# Altium PCB sunalsorises.PcbDoc
Units mm, origin at the board's own origin, x right, y up, seen from the top; angles counter-clockwise.
Board outline 71 x 21 mm, 2 copper layers (Top Layer, Bottom Layer); 25 components, 31 nets, 121 pads, 20 vias.
Unrouted connection lines stored in the file: 1.
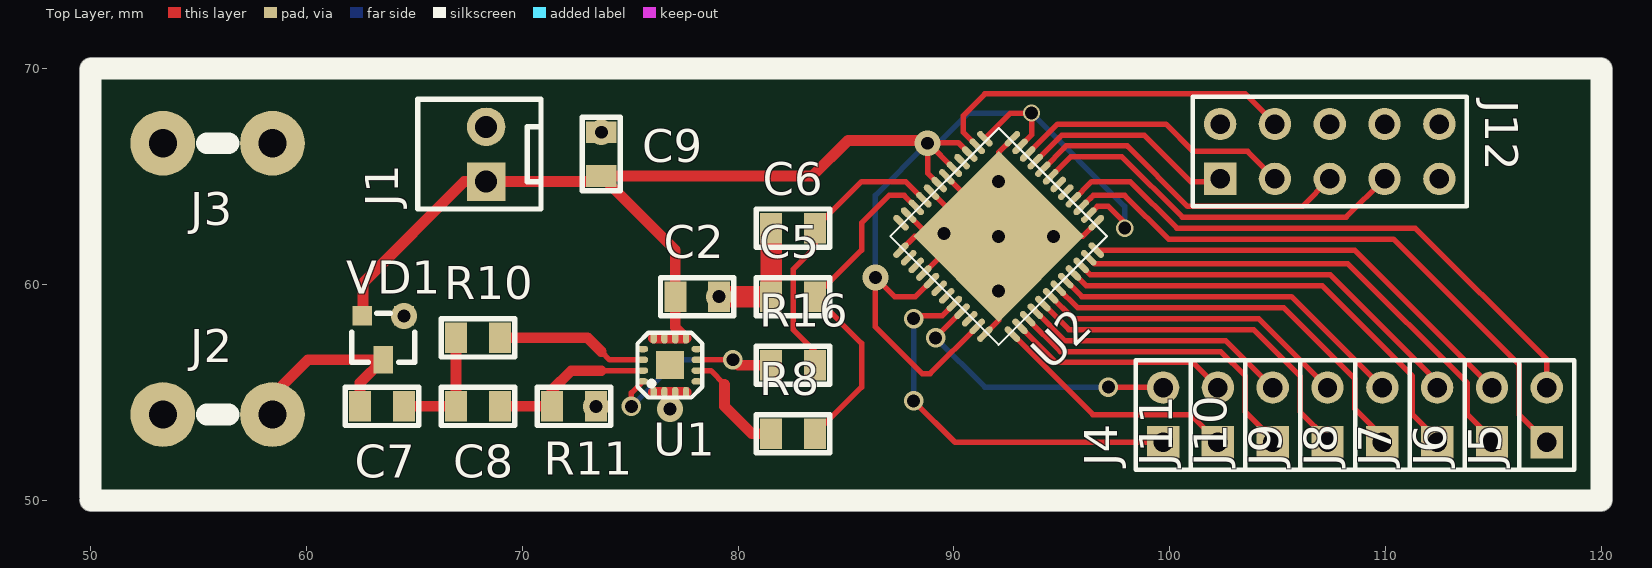
[diagram p0: Top Layer view]
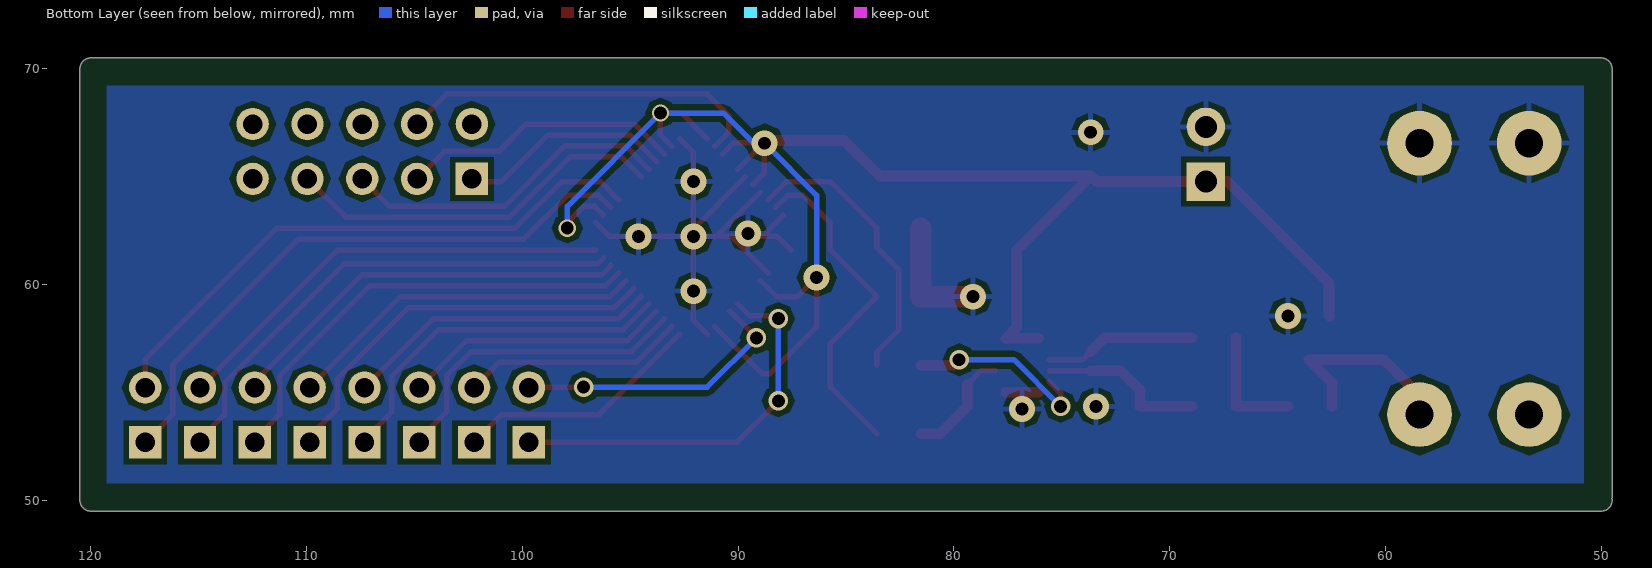
[diagram p1: Bottom Layer view, seen from below]
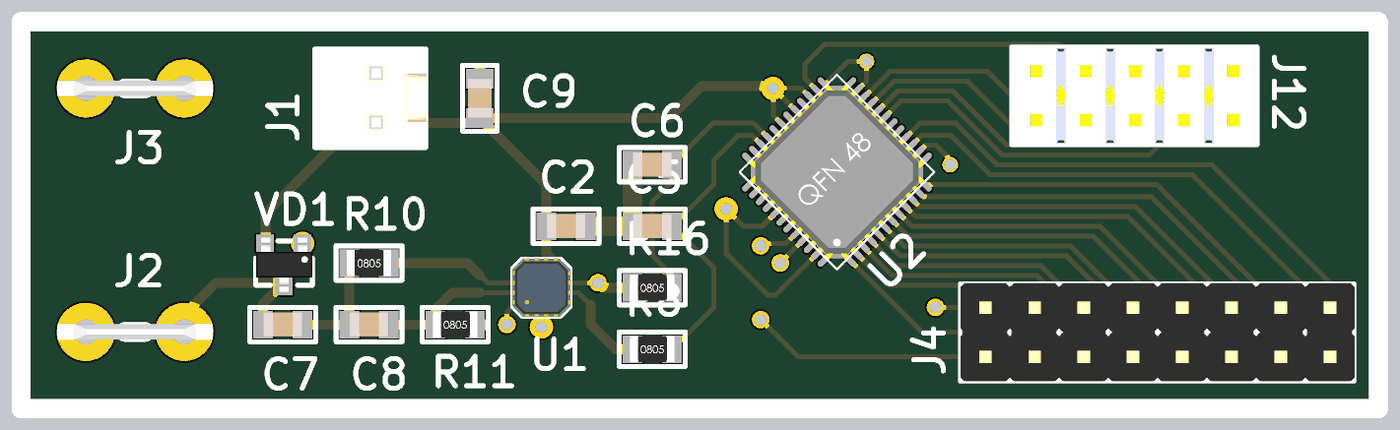
[diagram p2: 3D render of the assembled board from above, using the file's embedded part models]

## Layer stack, top to bottom
Top Solder: solder mask 0.0102, Solder Resist, Dk 3.5
Top Layer: signal copper 0.0356
Dielectric 1: dielectric 0.32, FR-4, Dk 4.8
Bottom Layer: signal copper 0.0356
Bottom Solder: solder mask 0.0102, Solder Resist, Dk 3.5

## Board outline
49.506,50.082 cw(c50,50.165) 49.5,50.165 49.5,70 cw(c50,70) 50,70.5 120,70.5 cw(c120,70) 120.5,70 120.5,50 cw(c120,50) 120,49.5 50,49.5 cw(c50,50)

## Design rules (kind name [scope] priority, off if disabled: settings)
Clearance [All] p1: gap=0.254
PolygonConnect [All] p1: connectstyle=Relief reliefconductorwidth=0.254 reliefentries=4 polygonreliefangle="90 Angle" airgapwidth=0.254
RoutingVias [All] p1: holewidth=0.711 width=1.27 viastyle="Through Hole" minholewidth=0.711 minwidth=1.27 maxholewidth=0.711 maxwidth=1.27
SolderMaskExpansion [All] p1: expansion=0.102
Width [All] p1: maxlimit=2 minlimit=0.254 preferedwidth=0.5 bottomlayer_maxwidth=0.254 bottomlayer_prefwidth=0.254 minimp=50.000000 maximp=50.000000 favimp=50.000000
29 further rules are at their usual default settings.

## Components (designator, comment, footprint, x,y, rotation, side; value= is the part's Value field where it differs from the comment)
C2 "CAP_0805" CAP_0805 78.105,59.436 r0 top
C5 "CAP_0805" CAP_0805 82.55,59.436 r0 top
C6 "CAP_0805" CAP_0805 82.55,62.611 r180 top
C7 "CAP_0805" CAP_0805 63.5,54.356 r0 top
C8 "CAP_0805" CAP_0805 67.945,54.356 r0 top
C9 "CAP_0805" CAP_0805 73.66,66.04 r90 top
J1 "WF-2" WF-2 68.326,64.77 r90 top
J2 "TA-M" TA-M 55.88,53.975 r180 top
J3 "TA-M" TA-M 55.88,66.548 r180 top
J4 "PLS-2" PLS-2 99.695,52.705 r90 top
J5 "PLS-2" PLS-2 117.475,52.705 r90 top
J6 "PLS-2" PLS-2 114.935,52.705 r90 top
J7 "PLS-2" PLS-2 112.395,52.705 r90 top
J8 "PLS-2" PLS-2 109.855,52.705 r90 top
J9 "PLS-2" PLS-2 107.315,52.705 r90 top
J10 "PLS-2" PLS-2 104.775,52.705 r90 top
J11 "PLS-2" PLS-2 102.235,52.705 r90 top
J12 "Header 5x2" "Header 5x2" 102.362,64.897 r0 top
R8 "" RES_0805 82.55,53.086 r0 top
R10 "" RES_0805 67.945,57.531 r0 top
R11 "" RES_0805 72.39,54.356 r0 top
R16 "" RES_0805 82.55,56.261 r0 top
U1 "ADA4932" ADA4932 76.835,56.261 r180 top
U2 "ADS61B49" ADS61B49 92.075,62.23 r135 top
VD1 "BAV99_3d" "SOT-23 - 3d" 64.516,58.547 r180 top

## Footprints (in the part's own frame and the unit in brackets; to place one, negate y for a bottom-side part, rotate by r counter-clockwise, add the part's x,y. Pads: shape width x height; smd on the part's side, far side on the other; paste and mask are expansions set on the pad)
ADA4932 [mm]
  rect 1.3x1.3 smd: 0(0,0)
  oval 0.5x0.3 smd: 1(1.25,0.75) 2(1.25,0.25) 3(1.25,-0.25) 4(1.25,-0.75) 9(-1.25,-0.75) 10(-1.25,-0.25) 11(-1.25,0.25) 12(-1.25,0.75)
  oval 0.3x0.5 smd: 5(0.75,-1.25) 6(0.25,-1.25) 7(-0.25,-1.25) 8(-0.75,-1.25) 13(-0.75,1.25) 14(-0.25,1.25) 15(0.25,1.25) 16(0.75,1.25)
  silkscreen extent -1.5,-1.5 1.5,1.5, body extent -1.52,-1.52 1.52,1.52, height 0.9
ADS61B49 [mm]
  rect 5.6x5.6 smd: 0(0,0)
  oval 0.3x0.9 smd: 1(-2.75,3.65) 2(-2.25,3.65) 3(-1.75,3.65) 4(-1.25,3.65) 5(-0.75,3.65) 6(-0.25,3.65) 7(0.25,3.65) 8(0.75,3.65) 9(1.25,3.65) 10(1.75,3.65) 11(2.25,3.65) 12(2.75,3.65) 25(2.75,-3.65) 26(2.25,-3.65) 27(1.75,-3.65) 28(1.25,-3.65) 29(0.75,-3.65) 30(0.25,-3.65) 31(-0.25,-3.65) 32(-0.75,-3.65) 33(-1.25,-3.65) 34(-1.75,-3.65) 35(-2.25,-3.65) 36(-2.75,-3.65)
  oval 0.9x0.3 smd: 13(3.65,2.75) 14(3.65,2.25) 15(3.65,1.75) 16(3.65,1.25) 17(3.65,0.75) 18(3.65,0.25) 19(3.65,-0.25) 20(3.65,-0.75) 21(3.65,-1.25) 22(3.65,-1.75) 23(3.65,-2.25) 24(3.65,-2.75) 37(-3.65,-2.75) 38(-3.65,-2.25) 39(-3.65,-1.75) 40(-3.65,-1.25) 41(-3.65,-0.75) 42(-3.65,-0.25) 43(-3.65,0.25) 44(-3.65,0.75) 45(-3.65,1.25) 46(-3.65,1.75) 47(-3.65,2.25) 48(-3.65,2.75)
  silkscreen extent -3.55,-3.55 3.55,3.55, body extent -3.5,-3.51 3.51,3.5, height 0.83
CAP_0805 [mil]
  rect 40x56 smd: 1(-40,0) 2(40,0)
  silkscreen extent -67,-35 67,35, body extent -39,-25 39,25, height 24
"Header 5x2" [mm]
  rect 1.5x1.5 hole 0.9: 1(-0.025,0)
  round 1.5 hole 0.9: 2(-0.025,2.54) 3(2.515,0) 4(2.515,2.54) 5(5.055,0) 6(5.055,2.54) 7(7.595,0) 8(7.595,2.54) 9(10.135,0) 10(10.135,2.54)
  silkscreen extent -1.29,-1.28 11.4,3.81, body extent -1.27,-1.26 11.43,3.82, height 8.38
PLS-2 [mm]
  rect 1.5x1.5 hole 0.9: 1(-0.02,0)
  round 1.5 hole 0.9: 2(2.52,0)
  silkscreen extent -1.29,-1.28 3.79,1.27, body extent -1.29,-1.3 3.79,1.24, height 8.54
RES_0805 [mil]
  rect 40x56 smd: 1(-40,0) 2(40,0)
  silkscreen extent -67,-35 67,35, body extent -45,-27 45,27, height 30
"SOT-23 - 3d" [mil]
  rect 36x36 smd: 1(0,0) 2(76,0)
  rect 36x50 smd: 3(38,80)
  silkscreen extent -20,-5 95,85, body extent -20,-12 94,98, height 51
TA-M [mm]
  round 3 hole 1.3: 1(-2.54,0) 1(2.54,0)
  silkscreen extent -0.5,0 0.5,0, body extent -4,-0.4 4,0.4, height 10.5
WF-2 [mil]
  rect 70x70 hole 40: 1(0,0)
  round 70 hole 40: 2(100,0)
  silkscreen extent -50,-100 150,125, body extent -47,-102 150,126, height 457

## Part data
R8 R10 R11 R16: library part RES_0805

## Via types
v1: diameter 1.2, hole 0.6, Top Layer to Bottom Layer, 12 vias
v2: diameter 0.9, hole 0.6, Top Layer to Bottom Layer, 6 vias
v3: diameter 0.8, hole 0.6, Top Layer to Bottom Layer, 2 vias

## Nets (pads, with @x,y where several pads share a name; then routed paths per layer and width w, separated by ;. In a path a pad name is that pad's centre, name@x,y a point inside that pad or via, vN(x,y) a via of type N, cw(c..) or ccw(c..) an arc to the next point about the centre after c; other vN are vias at no path point)
GND: C2.2 C5.1 C6.2 C9.2 J1.2 J3.1 R11.2 U1.13 U2.1 U2.9 U2.12 U2.14 U2.17 U2.19 U2.25 U2.36 VD1.1 | length 36.2
  Top Layer w0.254: U2.12 88.186,62.23 88.646,62.23 ; U2.14 88.646,62.477 88.646,62.23 ; U2.9 90.307,62.23 ; U2.17 91.014,62.23 ; U2.19 v1@92.075,62.584 ; U2.1 92.075,58.341 v1(92.075,62.23) ; U2.25 92.075,66.119 v1@92.075,62.584 ; U2.36 95.964,62.23 v1(92.075,62.23) ; 88.646,62.23 90.307,62.23 ; 90.307,62.23 91.014,62.23 ; 91.014,62.23 v1(92.075,62.23) ; v1(92.075,62.23) v1@92.075,62.584
  Top Layer w0.5: 76.085,55.011 76.585,55.011 77.085,55.011 U1.13
  Top Layer w1: v1(79.121,59.436) C5.1 C6.2
  other v1: 76.835,54.229 73.406,54.356 64.516,58.547 92.075,59.69 94.615,62.23 89.535,62.357 92.075,64.77 73.66,67.056
NetC5_2: C5.2 R8.2 U2.15 | length 15.8
  Top Layer w0.254: R8.2 85.725,55.245 85.725,57.277 C5.2 85.719,61.589 85.719,62.859 86.995,64.135 87.695,64.135 U2.15
NetC6_1: C6.1 R16.2 U2.16 | length 13.5
  Top Layer w0.254: R16.2 83.566,56.896 82.55,57.912 82.55,60.706 83.566,61.722 C6.1 85.725,64.77 87.767,64.77 U2.16
NetC7_1: C7.1 J2.1 VD1.3 | length 9.3
  Top Layer w0.5: J2.1@58.42,53.975 58.42,54.864 60.071,56.515 VD1.3 62.484,55.448 C7.1
NetC7_2: C7.2 C8.1 R10.1 | length 5.6
  Top Layer w0.5: C7.2 C8.1 R10.1
NetC8_2: C8.2 R11.1 U1.2 | length 7.8
  Top Layer w0.254: 73.66,56.007 73.664,56.011 U1.2
  Top Layer w0.5: C8.2 R11.1 71.374,55.118 72.263,56.007 73.66,56.007
NetJ4_1: J4.1 U2.5 | length 18
  Top Layer w0.254: v2(88.138,54.61) 90.063,52.685 J4.1 ; v2@88.392,58.547 89.453,58.547 U2.5
  Bottom Layer w0.254: v2(88.138,54.61) v2(88.138,58.42)
NetJ4_2: J4.2 U2.4 | length 12.9
  Top Layer w0.254: v2@89.408,57.785 89.408,57.795 U2.4 ; v2(97.155,55.245) 99.675,55.245 J4.2
  Bottom Layer w0.254: v2(89.154,57.531) 91.44,55.245 v2(97.155,55.245)
NetJ5_1: J5.1 U2.34 | length 27.9
  Top Layer w0.254: U2.34 96.328,64.008 ; 96.334,64.002 96.466,64.135 97.917,64.135 99.949,62.103 110.363,62.103 116.205,56.261 116.205,53.955 J5.1
NetJ5_2: J5.2 U2.33 | length 27
  Top Layer w0.254: U2.33 96.383,64.77 98.171,64.77 100.33,62.611 111.379,62.611 117.475,56.515 J5.2
NetJ6_1: J6.1 U2.38 | length 23.2
  Top Layer w0.254: U2.38 96.527,60.96 108.259,60.96 113.792,55.427 113.792,53.975 114.935,52.832 J6.1
NetJ6_2: J6.2 U2.37 | length 21
  Top Layer w0.254: U2.37 108.566,61.594 J6.2
NetJ7_1: J7.1 U2.40 | length 21.2
  Top Layer w0.254: U2.40 96.129,59.944 107.061,59.944 111.252,55.753 111.252,53.975 112.395,52.832 J7.1
NetJ7_2: J7.2 U2.39 | length 19
  Top Layer w0.254: U2.39 96.328,60.452 107.442,60.452 112.395,55.499 J7.2
NetJ8_1: J8.1 U2.42 | length 19
  Top Layer w0.254: U2.42 95.731,58.928 105.283,58.928 108.585,55.626 108.585,54.233 109.855,52.963 J8.1
NetJ8_2: J8.2 U2.41 | length 16.7
  Top Layer w0.254: U2.41 95.93,59.436 105.644,59.436 J8.2
NetJ9_1: J9.1 U2.44 | length 16.9
  Top Layer w0.254: U2.44 95.332,57.912 103.886,57.912 106.045,55.753 106.045,54.102 107.315,52.832 J9.1
NetJ9_2: J9.2 U2.43 | length 14.6
  Top Layer w0.254: U2.43 95.531,58.42 104.12,58.42 J9.2
NetJ10_1: J10.1 U2.46 | length 14.8
  Top Layer w0.254: U2.46 94.934,56.896 102.362,56.896 103.505,55.753 103.505,54.102 104.775,52.832 J10.1
NetJ10_2: J10.2 U2.45 | length 12.5
  Top Layer w0.254: U2.45 95.133,57.404 102.596,57.404 J10.2
NetJ11_1: J11.1 U2.48 | length 11.6
  Top Layer w0.254: U2.48 96.441,53.975 100.965,53.975 102.235,52.705 J11.1
NetJ11_2: J11.2 U2.47 | length 10.3
  Top Layer w0.254: U2.47 94.735,56.388 101.072,56.388 J11.2
NetJ12_1: J12.1 U2.28 | length 10
  Top Layer w0.254: U2.28 95.001,66.924 98.811,66.924 100.965,64.77 102.21,64.77 J12.1
NetJ12_3: J12.3 U2.27 | length 13.1
  Top Layer w0.254: U2.27 94.807,67.437 99.822,67.437 101.092,66.167 103.607,66.167 J12.3
NetJ12_4: J12.4 U2.23 | length 17.2
  Top Layer w0.254: U2.23 90.424,67.063 90.424,67.818 91.44,68.834 103.505,68.834 104.877,67.462 J12.4
NetJ12_5: J12.5 U2.29 | length 15.4
  Top Layer w0.254: U2.29 95.205,66.421 98.044,66.421 ; 98.044,66.416 100.833,63.627 106.147,63.627 J12.5
NetJ12_7: J12.7 U2.30 | length 17.8
  Top Layer w0.254: U2.30 95.404,65.913 97.79,65.913 100.584,63.119 108.179,63.119 J12.7
NetR8_1: R8.1 U1.11 | length 5.3
  Top Layer w0.254: U1.11 78.736,56.011 79.375,55.372
  Top Layer w0.5: 79.375,55.372 79.375,54.356 80.645,53.086 R8.1
NetR10_2: R10.2 U1.3 | length 7
  Top Layer w0.254: 73.66,56.896 74.045,56.511 U1.3
  Top Layer w0.5: R10.2 73.025,57.531 73.66,56.896
NetR16_1: R16.1 U1.1 U1.10 | length 10.5
  Top Layer w0.254: v2(75.057,54.356) 75.057,54.983 U1.1 ; U1.10 79.752,56.511 v2(79.756,56.515)
  Top Layer w0.5: v2(79.756,56.515) 80.01,56.261 R16.1
  Bottom Layer w0.254: v2(75.057,54.356) 77.216,56.515 v2(79.756,56.515)
VCC: C2.1 C9.1 J1.1 U1.5 U2.2 U2.8 U2.18 U2.20 U2.22 U2.24 U2.26 U2.35 VD1.2 | length 85.6
  Top Layer w0.254: U2.8 88.22,59.436 87.249,59.436 v1(86.36,60.325) 86.36,58.039 88.522,55.877 88.903,55.877 U2.2 ; U2.18 88.795,65.156 v1@88.795,66.57 ; U2.20 v1@88.795,66.57 ; U2.22 90.21,66.57 v1@88.795,66.57 ; U2.24 92.628,67.945 v3(93.599,67.945) 93.599,66.936 U2.26 ; U2.35 96.654,63.627 97.155,63.627 v3@98.044,62.738
  Top Layer w0.5: VD1.2 62.611,58.572 62.611,60.071 67.31,64.77 J1.1 73.406,64.77 C9.1 ; U1.5 77.585,57.511 ; 77.573,57.523 77.089,58.007 C2.1 77.089,61.595 C9.1 ; v1@88.795,66.57 88.691,66.675 85.09,66.675 83.439,65.024 C9.1
  Bottom Layer w0.254: v1(86.36,60.325) 86.36,64.135 v1(88.773,66.548) ; v1@89.027,66.294 90.678,67.945 v3(93.599,67.945) 97.917,63.627 v3(97.917,62.611)
pads on no net: J12.2 J12.6 J12.8 J12.9 J12.10 U1.0 U1.4 U1.6 U1.7 U1.8 U1.9 U1.12 U1.14 U1.15 U1.16 U2.0 U2.3 U2.6 U2.7 U2.10 U2.11 U2.13 U2.21 U2.31 U2.32

## Polygon pours and split planes (outlines as drawn)
GND on Bottom Layer "GND" (solid, pour order 2): 50.8,69.215 119.253,69.215 119.253,50.8 50.8,50.8

## Silkscreen, mask and mechanical layers (free items; w line width, h text height)
Top Overlay:
  lines w1: 50,50 120,50 120,70 50,70 50,50.165